# Altium PCB Driver4RackV3.9.PcbDoc
Units mm, origin at the board's own origin, x right, y up, seen from the top; angles counter-clockwise.
Board outline 134 x 129 mm, 2 copper layers (Top Layer, Bottom Layer); 115 components, 99 nets, 567 pads, 33 vias.
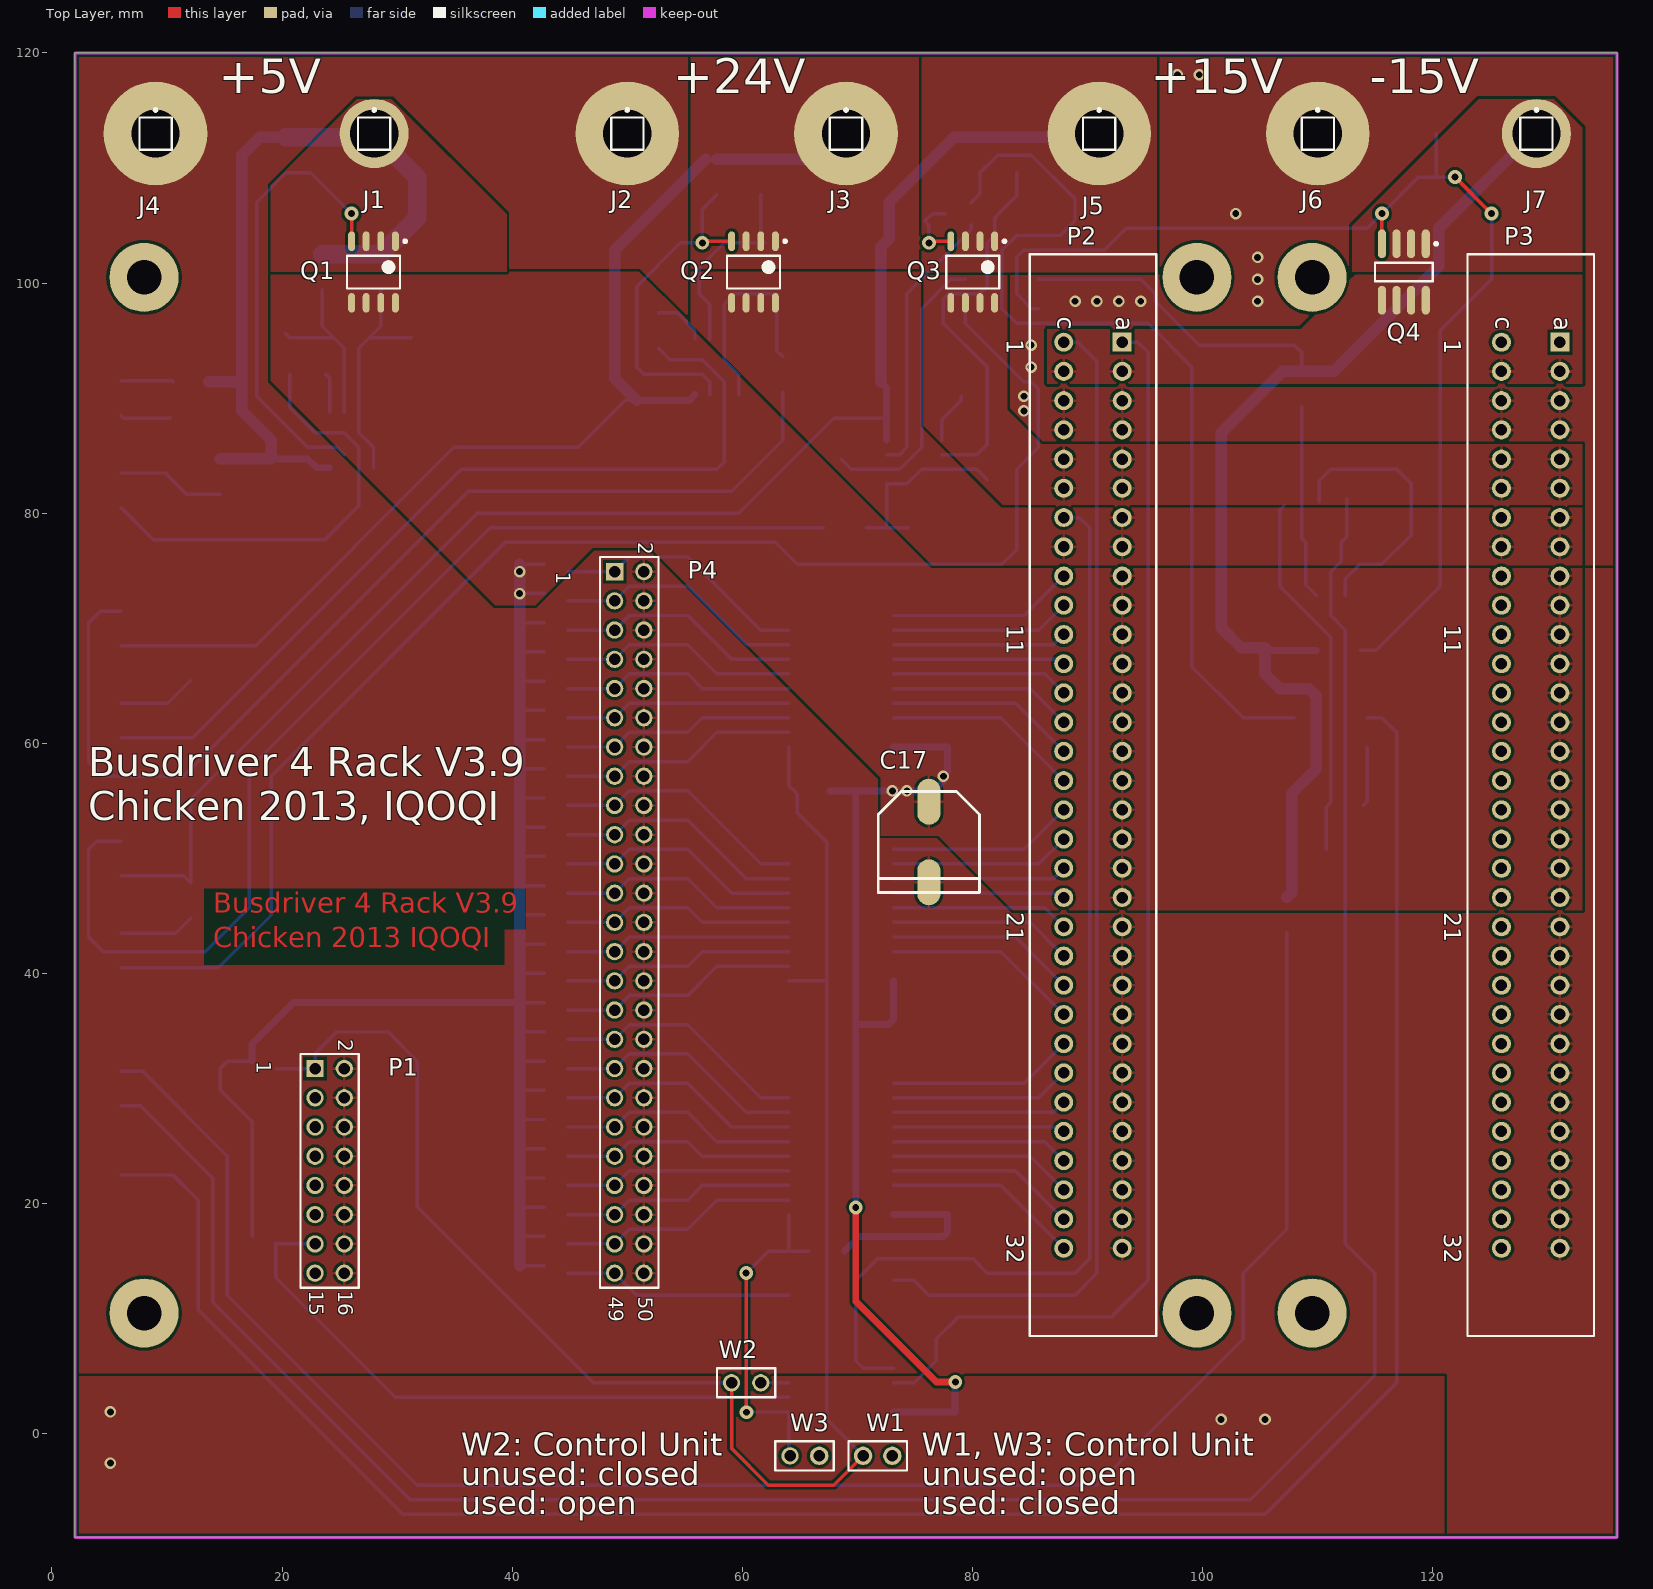
[diagram p0: Top Layer view]
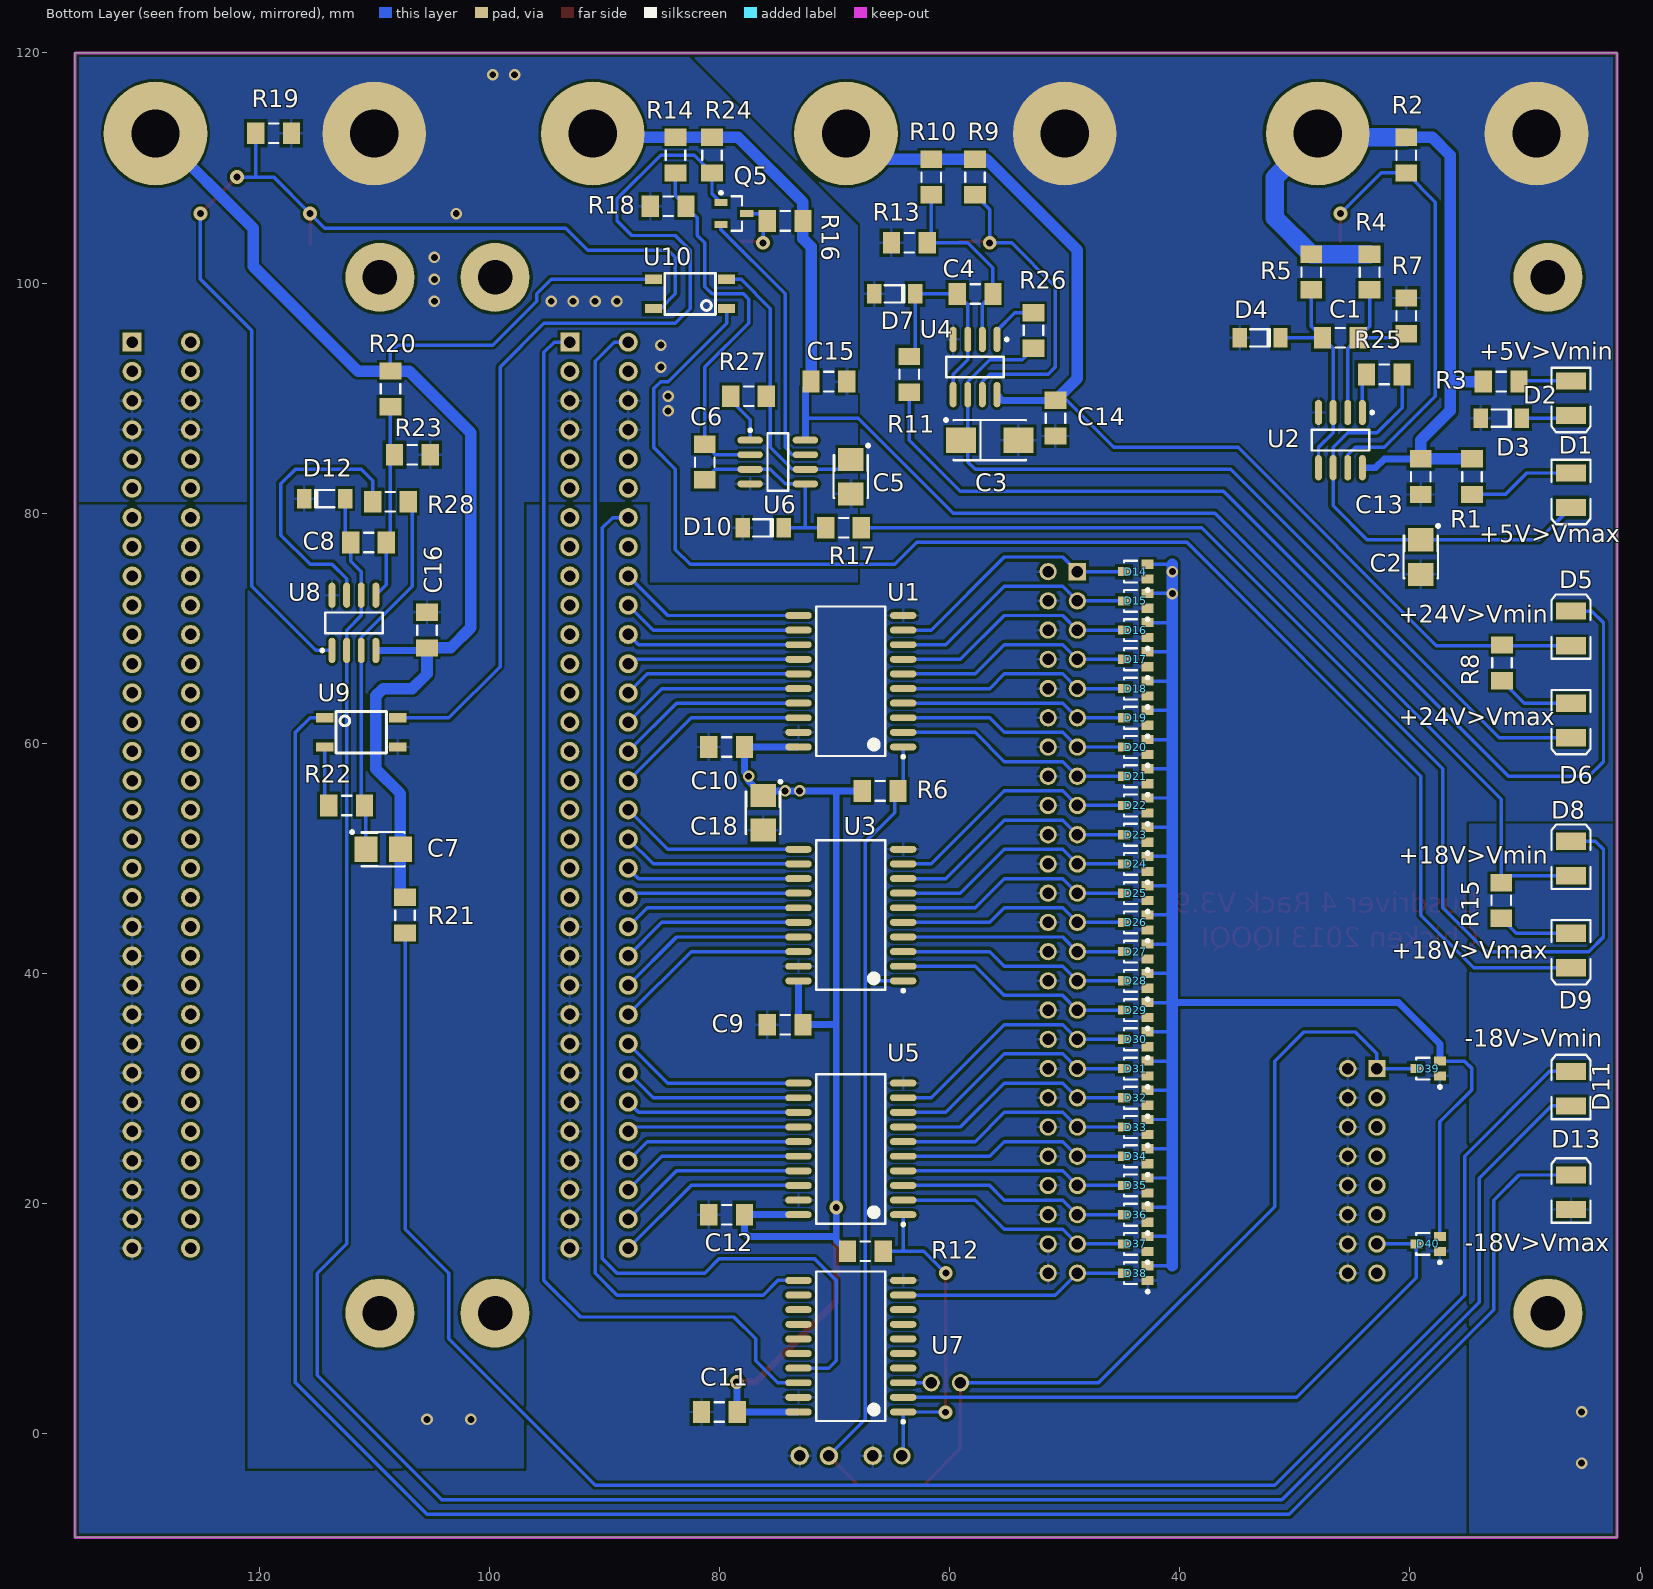
[diagram p1: Bottom Layer view, seen from below]

## Layer stack, top to bottom
Top Solder: solder mask 0.0102, Solder Resist, Dk 3.5
Top Layer: signal copper 0.0356
Dielectric1: dielectric 0.32, FR-4, Dk 4.8
Bottom Layer: signal copper 0.0356
Bottom Solder: solder mask 0.0102, Solder Resist, Dk 3.5

## Board outline
136,-9 2,-9 2,120 136,120

## Design rules (kind name [scope] priority, off if disabled: settings)
Clearance Clearance_2 [InNet('+5V','++5V','+24V','++24V','+18V','++18V','-18V','--18V','DGND','AGND') vs InNet('+5V','++5V','+24V','++24V','+18V','++18V','-18V','--18V','DGND','AGND')] p1 off: gap=0.5
Clearance [All] p2: gap=0.254
HoleSize [All] p1: absolutevalues=TRUE maxlimit=5 minlimit=0.025 maxpercent=80.000 minpercent=20.000
PolygonConnect PolygonConnect_1 [(ObjectKind = 'Via') And (ViaDiameter = AsMM(1)) And (HoleDiameter = AsMM(0.6))] p1: connectstyle=Direct reliefconductorwidth=0.254 reliefentries=4 polygonreliefangle="90 Angle" airgapwidth=0.254
PolygonConnect PolygonConnect_2 [InNet('+5V','++5V','+24V','++24V','+18V','++18V','-18V','--18V','DGND','AGND') vs ((ObjectKind = 'Pad') And (HoleDiameter = AsMM(4.2))) Or InComponent('Q1','Q2','Q3','Q4')] p2: connectstyle=Direct reliefconductorwidth=0.254 reliefentries=4 polygonreliefangle="90 Angle" airgapwidth=0.254
PolygonConnect [All] p3: connectstyle=Relief reliefconductorwidth=0.254 reliefentries=4 polygonreliefangle="90 Angle" airgapwidth=0.254
RoutingVias [All] p1: holewidth=0.6 width=1.2 viastyle="Through Hole" minholewidth=0.4 minwidth=1 maxholewidth=1 maxwidth=2
SilkToSolderMaskClearance SilkscreenOverComponentPads [IsPad] p1: minsilkscreentomaskgap=0.254 clearancetoexposedcopper=TRUE
SolderMaskExpansion [All] p1: expansion=0.102
Width [All] p1: maxlimit=5 minlimit=0.254 preferedwidth=0.254
27 further rules are at their usual default settings.

## Components (designator, comment, footprint, x,y, rotation, side; value= is the part's Value field where it differs from the comment)
C1 "Cap" CAPC3216M 26.035,95.25 r180 bottom
C2 "Cap Pol1" TC3528-1411 19.05,76.2 r270 bottom
C3 "Cap Pol1" TC6032-2412 56.515,86.36 r180 bottom
C4 "Cap" CAPC3216M 57.785,99.06 r180 bottom
C5 "Cap Pol1" TC3528-1411 68.58,83.185 r270 bottom
C6 "Cap" CAPC3216M 81.28,84.455 r90 bottom
C7 "Cap Pol1" TC3528-1411 109.22,50.8 r180 bottom
C8 "Cap" CAPC3216M 110.49,77.47 r180 bottom
C9 "Cap" CAPC3216M 74.295,35.56 r180 bottom
C10 "Cap" CAPC3216M 79.375,59.69 r180 bottom
C11 "Cap" CAPC3216M 80.01,1.905 r180 bottom
C12 "Cap" CAPC3216M 79.375,19.05 r180 bottom
C13 "Cap" CAPC3216M 19.05,83.185 r90 bottom
C14 "Cap" CAPC3216M 50.8,88.265 r90 bottom
C15 "Cap" CAPC3216M 70.485,91.44 r0 bottom
C16 "Cap" CAPC3216M 105.41,69.85 r90 bottom
C17 "Cap Pol1" ElkoSMD8 76.2,51.435 r180 top
C18 "Cap Pol1" TC3528-1411 76.2,53.975 r270 bottom
D1 "+5V>Vmax" 3.5X2.8X1.9 6,82 r270 bottom
D2 "+5V>Vmin" 3.5X2.8X1.9 6,90 r270 bottom
D3 "3V3" sod80c 12.065,88.265 r180 bottom
D4 "2V7" sod80c 33.02,95.25 r180 bottom
D5 "+24V>Vmin" 3.5X2.8X1.9 6,70 r90 bottom
D6 "+24V>Vmax" 3.5X2.8X1.9 6,62 r270 bottom
D7 "20V" sod80c 64.77,99.06 r180 bottom
D8 "+18V>Vmin" 3.5X2.8X1.9 6,50 r90 bottom
D9 "+18V>Vmax" 3.5X2.8X1.9 6,42 r270 bottom
D10 "12V" sod80c 76.2,78.74 r180 bottom
D11 "-18V>Vmin" 3.5X2.8X1.9 6,30 r90 bottom
D12 "12V" sod80c 114.3,81.28 r0 bottom
D13 "-18V>Vmax" 3.5X2.8X1.9 6,21 r90 bottom
D14 "1PS70SB14" SOT323 43.815,74.93 r90 bottom
D15 "1PS70SB14" SOT323 43.815,72.39 r90 bottom
D16 "1PS70SB14" SOT323 43.815,69.85 r90 bottom
D17 "1PS70SB14" SOT323 43.815,67.31 r90 bottom
D18 "1PS70SB14" SOT323 43.815,64.77 r90 bottom
D19 "1PS70SB14" SOT323 43.815,62.23 r90 bottom
D20 "1PS70SB14" SOT323 43.815,59.69 r90 bottom
D21 "1PS70SB14" SOT323 43.815,57.15 r90 bottom
D22 "1PS70SB14" SOT323 43.815,54.61 r90 bottom
D23 "1PS70SB14" SOT323 43.815,52.07 r90 bottom
D24 "1PS70SB14" SOT323 43.815,49.53 r90 bottom
D25 "1PS70SB14" SOT323 43.815,46.99 r90 bottom
D26 "1PS70SB14" SOT323 43.815,44.45 r90 bottom
D27 "1PS70SB14" SOT323 43.815,41.91 r90 bottom
D28 "1PS70SB14" SOT323 43.815,39.37 r90 bottom
D29 "1PS70SB14" SOT323 43.815,36.83 r90 bottom
D30 "1PS70SB14" SOT323 43.815,34.29 r90 bottom
D31 "1PS70SB14" SOT323 43.815,31.75 r90 bottom
D32 "1PS70SB14" SOT323 43.815,29.21 r90 bottom
D33 "1PS70SB14" SOT323 43.815,26.67 r90 bottom
D34 "1PS70SB14" SOT323 43.815,24.13 r90 bottom
D35 "1PS70SB14" SOT323 43.815,21.59 r90 bottom
D36 "1PS70SB14" SOT323 43.815,19.05 r90 bottom
D37 "1PS70SB14" SOT323 43.815,16.51 r90 bottom
D38 "1PS70SB14" SOT323 43.815,13.97 r90 bottom
D39 "1PS70SB14" SOT323 18.415,31.75 r90 bottom
D40 "1PS70SB14" SOT323 18.415,16.51 r90 bottom
J1 "+5V" PIN1#1 28,113 r0 top
J2 "DGND" PIN1#2 50,113 r0 top
J3 "+24V" PIN1#2 69,113 r0 top
J4 "DGND" PIN1#2 9,113 r0 top
J5 "+18V" PIN1#2 91,113 r0 top
J6 "AGND" PIN1#2 110,113 r0 top
J7 "-18V" PIN1#1 129,113 r0 top
P1 "Header 8X2" HDR2X8 22.86,31.75 r270 top
P2 "2x32 Pin" 0903164x922 90.46,55.5 r270 top
P3 "2x32 Pin" 0903164x922 128.5,55.5 r270 top
P4 "Header 25X2" HDR2X25 48.895,74.93 r270 top
Q1 "TPC8120" 2-6J1B 27.94,100.965 r270 top
Q2 "TPC8120" 2-6J1B 60.96,100.965 r270 top
Q3 "TPC8120" 2-6J1B 80.01,100.965 r270 top
Q4 "FDS6699S" SO-8_M 117.475,100.965 r270 top
Q5 "NPN" SOT-23B_N 78.74,106.045 r180 bottom
R1 "Res2" RESC3216M 14.605,83.185 r90 bottom
R2 "Res2" RESC3216M 20.32,111.125 r90 bottom
R3 "Res2" RESC3216M 12.065,91.44 r0 bottom
R4 "Res2" RESC3216M 23.495,100.965 r90 bottom
R5 "Res2" RESC3216M 28.575,100.965 r90 bottom
R6 "Res2" RESC3216M 66.04,55.88 r0 bottom
R7 "Res2" RESC3216M 20.32,97.155 r270 bottom
R8 "Res2" RESC3216M 12,67 r90 bottom
R9 "Res2" RESC3216M 57.785,109.22 r90 bottom
R10 "Res2" RESC3216M 61.595,109.22 r90 bottom
R11 "Res2" RESC3216M 63.5,92.075 r270 bottom
R12 "Res2" RESC3216M 67.31,15.875 r0 bottom
R13 "Res2" RESC3216M 63.5,103.505 r180 bottom
R14 "Res2" RESC3216M 83.82,111.125 r90 bottom
R15 "Res2" RESC3216M 12.065,46.355 r90 bottom
R16 "Res2" RESC3216M 74.295,105.41 r180 bottom
R17 "Res2" RESC3216M 69.215,78.74 r0 bottom
R18 "Res2" RESC3216M 84.455,106.68 r180 bottom
R19 "Res2" RESC3216M 118.745,113.03 r0 bottom
R20 "Res2" RESC3216M 108.585,90.805 r90 bottom
R21 "Res2" RESC3216M 107.315,45.085 r270 bottom
R22 "Res2" RESC3216M 112.395,54.61 r180 bottom
R23 "Res2" RESC3216M 106.68,85.09 r0 bottom
R24 "Res3216" RESC3216M 80.645,111.125 r270 bottom
R25 "3216" RESC3216M 22.225,92.075 r180 bottom
R26 "3216" RESC3216M 52.705,95.885 r270 bottom
R27 "3216" RESC3216M 77.47,90.17 r180 bottom
R28 "3216" RESC3216M 108.585,81 r180 bottom
U1 "74VHC245D" DW020_N 68.58,65.405 r0 bottom
U2 "LM2903D" 751-02_N 26.035,86.36 r270 bottom
U3 "74VHC245D" DW020_N 68.58,45.085 r0 bottom
U4 "LM2903D" 751-02_N 57.785,92.71 r270 bottom
U5 "74VHC245D" DW020_N 68.58,24.765 r0 bottom
U6 "LM2903D" 751-02_N 74.93,84.455 r180 bottom
U7 "74VHC245D" DW020_N 68.58,7.62 r0 bottom
U8 "LM2903D" 751-02_N 111.76,70.485 r90 bottom
U9 "PC357" PC357NJ 111.125,60.96 r180 bottom
U10 "PC357" PC357NJ 82.55,99.06 r0 bottom
W1 "Jumper" RAD-0.1#1 71.755,-1.905 r180 top
W2 "Jumper" RAD-0.1#2 60.325,4.445 r180 top
W3 "Jumper" RAD-0.1#3 65.405,-1.905 r180 top

## Footprints (in the part's own frame and the unit in brackets; to place one, negate y for a bottom-side part, rotate by r counter-clockwise, add the part's x,y. Pads: shape width x height; smd on the part's side, far side on the other; paste and mask are expansions set on the pad)
2-6J1B [mm] "Mosfet Toshiba TPC8120"
  oval 1.7x0.6 smd: 1(-2.675,1.905) 2(-2.675,0.635) 3(-2.675,-0.635) 4(-2.675,-1.905) 5(2.675,-1.905) 6(2.675,-0.635) 7(2.675,0.635) 8(2.675,1.905)
  silkscreen extent -2.8,-2.3 1.42,2.88, body extent -2.1,-2.3 2.1,2.3, height 1.7
3.5X2.8X1.9 [mm] "SM LED; 2 C-Bend Leads; Body 3.5 x 2.8 x 1.9 mm, inc leads (LxWxH typ)"
  rect 1.5x2.6 smd: 1(-1.5,0) 2(1.5,0)
  silkscreen extent -2.65,-1.7 2.95,1.7
751-02_N [mm] "SOIC, 8-Leads, Body 4.9x3.9mm, Pitch 1.27mm, IPC Medium Density"
  oval 2.2x0.6 smd: 1(-2.4,1.905) 2(-2.4,0.635) 3(-2.4,-0.635) 4(-2.4,-1.905) 5(2.4,-1.905) 6(2.4,-0.635) 7(2.4,0.635) 8(2.4,1.905)
  silkscreen extent -2.52,-2.5 0.9,2.88, body extent -1.95,-2.45 1.95,2.45, height 1.75
0903164x922 [mm] "Connector; DIN 41612, Type C, Thru-Hole; Rows a+c, 64 Position; Vertical; No Mounting Fixture"
  rect 1.65x1.65 hole 1: A1(-39.37,2.54)
  round 1.65 hole 1: A2(-36.83,2.54) A3(-34.29,2.54) A4(-31.75,2.54) A5(-29.21,2.54) A6(-26.67,2.54) A7(-24.13,2.54) A8(-21.59,2.54) A9(-19.05,2.54) A10(-16.51,2.54) A11(-13.97,2.54) A12(-11.43,2.54) A13(-8.89,2.54) A14(-6.35,2.54) A15(-3.81,2.54) A16(-1.27,2.54) A17(1.27,2.54) A18(3.81,2.54) A19(6.35,2.54) A20(8.89,2.54) A21(11.43,2.54) A22(13.97,2.54) A23(16.51,2.54) A24(19.05,2.54) A25(21.59,2.54) A26(24.13,2.54) A27(26.67,2.54) A28(29.21,2.54) A29(31.75,2.54) A30(34.29,2.54) A31(36.83,2.54) A32(39.37,2.54) C1(-39.37,-2.54) C2(-36.83,-2.54) C3(-34.29,-2.54) C4(-31.75,-2.54) C5(-29.21,-2.54) C6(-26.67,-2.54) C7(-24.13,-2.54) C8(-21.59,-2.54) C9(-19.05,-2.54) C10(-16.51,-2.54) C11(-13.97,-2.54) C12(-11.43,-2.54) C13(-8.89,-2.54) C14(-6.35,-2.54) C15(-3.81,-2.54) C16(-1.27,-2.54) C17(1.27,-2.54) C18(3.81,-2.54) C19(6.35,-2.54) C20(8.89,-2.54) C21(11.43,-2.54) C22(13.97,-2.54) C23(16.51,-2.54) C24(19.05,-2.54) C25(21.59,-2.54) C26(24.13,-2.54) C27(26.67,-2.54) C28(29.21,-2.54) C29(31.75,-2.54) C30(34.29,-2.54) C31(36.83,-2.54) C32(39.37,-2.54)
  silkscreen extent -47,-5.5 47,5.5
CAPC3216M [mm] "Chip Capacitor, Body 3.2x1.6mm, IPC Low Density"
  rect 1.5x1.9 smd: 1(-1.55,0) 2(1.55,0)
  silkscreen extent -0.4,-0.85 0.4,0.85, body extent -1.7,-0.9 1.7,0.9, height 1.35
DW020_N [mm] "SOIC, 20-Leads, Body 12.8x7.5mm, Pitch 1.27mm, IPC Medium Density"
  oval 2.3x0.6 smd: 1(-4.55,5.715) 2(-4.55,4.445) 3(-4.55,3.175) 4(-4.55,1.905) 5(-4.55,0.635) 6(-4.55,-0.635) 7(-4.55,-1.905) 8(-4.55,-3.175) 9(-4.55,-4.445) 10(-4.55,-5.715) 11(4.55,-5.715) 12(4.55,-4.445) 13(4.55,-3.175) 14(4.55,-1.905) 15(4.55,-0.635) 16(4.55,0.635) 17(4.55,1.905) 18(4.55,3.175) 19(4.55,4.445) 20(4.55,5.715)
  silkscreen extent -4.67,-6.5 3,6.69, body extent -3.75,-6.4 3.75,6.4, height 2.65
ElkoSMD8 [mm] "loe ESR Elko, D:8mm"
  oval 2x4 smd: 1(0,-3.5) 2(0,3.5)
  silkscreen extent -4.4,-4.4 4.4,4.4
HDR2X8 [mm] "Connector; Header; 8x2 Position"
  rect 1.5x1.5 hole 1: 1(0,0)
  round 1.5 hole 1: 2(0,2.54) 3(2.54,0) 4(2.54,2.54) 5(5.08,0) 6(5.08,2.54) 7(7.62,0) 8(7.62,2.54) 9(10.16,0) 10(10.16,2.54) 11(12.7,0) 12(12.7,2.54) 13(15.24,0) 14(15.24,2.54) 15(17.78,0) 16(17.78,2.54)
  silkscreen extent -1.27,-1.27 19.05,3.81
HDR2X25 [mm] "Connector; Header; 25x2 Position"
  rect 1.5x1.5 hole 1: 1(0,0)
  round 1.5 hole 1: 2(0,2.54) 3(2.54,0) 4(2.54,2.54) 5(5.08,0) 6(5.08,2.54) 7(7.62,0) 8(7.62,2.54) 9(10.16,0) 10(10.16,2.54) 11(12.7,0) 12(12.7,2.54) 13(15.24,0) 14(15.24,2.54) 15(17.78,0) 16(17.78,2.54) 17(20.32,0) 18(20.32,2.54) 19(22.86,0) 20(22.86,2.54) 21(25.4,0) 22(25.4,2.54) 23(27.94,0) 24(27.94,2.54) 25(30.48,0) 26(30.48,2.54) 27(33.02,0) 28(33.02,2.54) 29(35.56,0) 30(35.56,2.54) 31(38.1,0) 32(38.1,2.54) 33(40.64,0) 34(40.64,2.54) 35(43.18,0) 36(43.18,2.54) 37(45.72,0) 38(45.72,2.54) 39(48.26,0) 40(48.26,2.54) 41(50.8,0) 42(50.8,2.54) 43(53.34,0) 44(53.34,2.54) 45(55.88,0) 46(55.88,2.54) 47(58.42,0) 48(58.42,2.54) 49(60.96,0) 50(60.96,2.54)
  silkscreen extent -1.27,-1.27 62.23,3.81
PC357NJ [mm] "Optokoppler"
  rect 1.5x0.8 smd: 1(-3.175,1.27) 2(-3.175,-1.27) 3(3.175,-1.27) 4(3.175,1.27)
  silkscreen extent -2.2,-1.8 2.2,1.8
PIN1#1 [mm] "Connector; Plug"
  round 6 / inner round 9 / far side round 9 hole 4.2: 1(0,0)
  silkscreen extent -1.4,-1.4 1.4,2.17
PIN1#2 [mm] "Connector; Plug"
  round 9 hole 4.2: 1(0,0)
  silkscreen extent -1.4,-1.4 1.4,2.17
RAD-0.1#1 [mm] "Radial Cap, Thru-Hole; 2 Leads; 0.1 in Pin Spacing"
  round 1.6 hole 1: 1(-1.27,0) 2(1.27,0)
  silkscreen extent -2.54,-1.27 2.54,1.27
RAD-0.1#2 [mm] "Radial Cap, Thru-Hole; 2 Leads; 0.1 in Pin Spacing"
  round 1.5 hole 1: 1(-1.27,0) 2(1.27,0)
  silkscreen extent -2.54,-1.27 2.54,1.27
RAD-0.1#3 [mm] "Radial Cap, Thru-Hole; 2 Leads; 0.1 in Pin Spacing"
  round 1.6 hole 1: 1(-1.27,0)
  round 1.5 hole 1: 2(1.27,0)
  silkscreen extent -2.54,-1.27 2.54,1.27
RESC3216M [mm] "Chip Resistor, Body 3.2x1.6mm, IPC Low Density"
  rect 1.5x1.9 smd: 1(-1.55,0) 2(1.55,0)
  silkscreen extent -0.4,-0.85 0.4,0.85, body extent -1.68,-0.87 1.68,0.87, height 0.71
SO-8_M [mm] "SOIC, 8-Leads, Body 4.9x3.9mm, Pitch 1.27mm, IPC Low Density"
  oval 2.5x0.7 smd: 1(-2.45,1.905) 2(-2.45,0.635) 3(-2.45,-0.635) 4(-2.45,-1.905) 5(2.45,-1.905) 6(2.45,-0.635) 7(2.45,0.635) 8(2.45,1.905)
  silkscreen extent -2.57,-2.5 0.8,2.93, body extent -2,-2.5 2,2.5, height 1.75
sod80c [mm] "Metal Electrode Face (MELF) Diode; Body 3.5 x 1.6 mm (LxDia)"
  rect 1.25x1.7 smd: 1(-1.775,0) 2(1.775,0)
  silkscreen extent -0.85,-0.75 0.85,0.75
SOT323 [mm] "SOT-323/SC-70; 3 Leads; Body 2.2 x 2.2 mm, inc. leads (LxW max)"
  rect 0.8x1.05 smd: 1(-0.65,-1.025) 2(0.65,-1.025) 3(0,1.025)
  silkscreen extent -1.72,-1.15 0.95,1.03
SOT-23B_N [mm] "SOT23, 3-Leads, Body 2.9x1.3mm, Pitch 0.95mm, Lead Span 2.4mm, IPC Medium Density"
  rect 1.15x0.6 smd: 1(-1.125,0.95) 2(-1.125,-0.95) 3(1.125,0)
  silkscreen extent -1.25,-1.5 0.7,1.92, body extent -0.7,-1.5 0.7,1.5, height 1.14
TC3528-1411 [mm] "Capacitor, SM Tantalum; Body 3.5 x 2.8 mm (LxW typ)"
  rect 2x2.2 smd: 1(-1.5,0) 2(1.5,0)
  silkscreen extent -2.82,-1.5 1.85,1.62
TC6032-2412 [mm] "Capacitor, SM Tantalum; Body 6.0 x 3.2 mm (LxW typ)"
  rect 2.6x2.2 smd: 1(-2.5,0) 2(2.5,0)
  silkscreen extent -3.93,-1.75 3.15,1.87

## Part data
C1 C4 C6 C8 C9 C10 C11 C12 C13 C14 C15 C16: "Capacitor"
C2 C3 C5 C7 C17 C18: "Polarized Capacitor (Radial)"
D1 D5 D6 D8 D9 D11 D13: library part LED1, "Typical RED GaAs LED"
D2: library part LED3, "Typical BLUE SiC LED"
D3 D4 D7 D10 D12: library part "D Zener", "Zener Diode"
D14 D15 D16 D17 D18 D19 D20 D21 D22 D23 D24 D25 D26 D27 D28 D29 D30 D31 D32 D33 D34 D35 D36 D37 D38 D39 D40: "Schottky Barrier Double Diode"
J1 J2 J3 J4 J5 J6 J7: library part Socket, "Socket"
P1: "Header, 8-Pin, Dual row"
P2 P3: library part "64 Pin Header", "DIN 41612"
P4: "Header, 25-Pin, Dual row"
Q1 Q2 Q3: "Mosfet P"
Q4: library part MOSFET-N, "N-Channel MOSFET"
Q5: library part QNPN, "NPN Bipolar Transistor"
R1 R2 R3 R4 R5 R6 R7 R8 R9 R10 R11 R12 R13 R14 R15 R16 R17 R18 R19 R20 R21 R22 R23: "Resistor"
R24 R25 R26 R27 R28: library part Resistor3216, "Resistor"
U1 U3 U5 U7: library part SN74HC245DW, "Octal Bus Transceiver with 3-State Outputs"
U2 U4 U6 U8: "Dual Comparator"
U9 U10: library part Optoisolator1, "4-Pin Phototransistor Optocoupler"
W1 W2 W3: "Jumper Wire"

## Free pads (board coordinates)
  round 6 hole 3: 0(8,100.5) 0(109.5,100.5) 1(99.5,100.5) 2(99.5,10.5) 2(109.5,10.5) 3(8,10.5)

## Via types
v1: diameter 1, hole 0.6, Top Layer to Bottom Layer, 23 vias
v2: diameter 1.2, hole 0.6, Top Layer to Bottom Layer, 10 vias

## Nets (pads, with @x,y where several pads share a name; then routed paths per layer and width w, separated by ;. In a path a pad name is that pad's centre, name@x,y a point inside that pad or via, vN(x,y) a via of type N, cw(c..) or ccw(c..) an arc to the next point about the centre after c; other vN are vias at no path point)
1: D14.3 P4.1 U1.9 | length 22.3
  Bottom Layer w0.3: D14.3 P4.1 50.165,76.2 55.245,76.2 61.595,69.85 U1.9
2: D15.3 P4.3 U1.8 | length 21.8
  Bottom Layer w0.3: D15.3 P4.3 50.165,73.66 55.245,73.66 60.325,68.58 U1.8
3: D16.3 P4.5 U1.7 | length 21.3
  Bottom Layer w0.3: D16.3 P4.5 50.165,71.12 55.245,71.12 59.055,67.31 U1.7
4: D17.3 P4.7 U1.6 | length 20.8
  Bottom Layer w0.3: D17.3 P4.7 50.165,68.58 55.245,68.58 57.785,66.04 U1.6
5: D18.3 P4.9 U1.5 | length 20.2
  Bottom Layer w0.3: D18.3 P4.9 50.165,66.04 55.245,66.04 56.515,64.77 U1.5
6: D19.3 P4.11 U1.4 | length 19.7
  Bottom Layer w0.3: D19.3 P4.11 50.165,63.5 U1.4
7: D20.3 P4.13 U1.3 | length 20.2
  Bottom Layer w0.3: D20.3 P4.13 50.165,60.96 55.245,60.96 56.515,62.23 U1.3
8: D21.3 P4.15 U1.2 | length 20.8
  Bottom Layer w0.3: D21.3 P4.15 50.165,58.42 55.245,58.42 57.785,60.96 U1.2
9: D22.3 P4.17 U3.9 | length 22.3
  Bottom Layer w0.3: D22.3 P4.17 50.165,55.88 55.245,55.88 61.595,49.53 U3.9
10: D23.3 P4.19 U3.8 | length 21.8
  Bottom Layer w0.3: D23.3 P4.19 50.165,53.34 55.245,53.34 60.325,48.26 U3.8
11: D24.3 P4.21 U3.7 | length 21.3
  Bottom Layer w0.3: D24.3 P4.21 50.165,50.8 55.245,50.8 59.055,46.99 U3.7
12: D25.3 P4.23 U3.6 | length 20.8
  Bottom Layer w0.3: D25.3 P4.23 50.165,48.26 55.245,48.26 57.785,45.72 U3.6
13: D26.3 P4.25 U3.5 | length 20.2
  Bottom Layer w0.3: D26.3 P4.25 50.165,45.72 55.245,45.72 56.515,44.45 U3.5
14: D27.3 P4.27 U3.4 | length 19.7
  Bottom Layer w0.3: D27.3 P4.27 50.165,43.18 U3.4
15: D28.3 P4.29 U3.3 | length 20.2
  Bottom Layer w0.3: D28.3 P4.29 50.165,40.64 55.245,40.64 56.515,41.91 U3.3
16: D29.3 P4.31 U3.2 | length 20.8
  Bottom Layer w0.3: D29.3 P4.31 50.165,38.1 55.245,38.1 57.785,40.64 U3.2
17: D30.3 P4.33 U5.9 | length 22.3
  Bottom Layer w0.3: D30.3 P4.33 50.165,35.56 55.245,35.56 61.595,29.21 U5.9
18: D31.3 P4.35 U5.8 | length 21.8
  Bottom Layer w0.3: D31.3 P4.35 50.165,33.02 55.245,33.02 60.325,27.94 U5.8
19: D32.3 P4.37 U5.7 | length 21.3
  Bottom Layer w0.3: D32.3 P4.37 50.165,30.48 55.245,30.48 59.055,26.67 U5.7
20: D33.3 P4.39 U5.6 | length 20.8
  Bottom Layer w0.3: D33.3 P4.39 50.165,27.94 55.245,27.94 57.785,25.4 U5.6
21: D34.3 P4.41 U5.5 | length 20.2
  Bottom Layer w0.3: D34.3 P4.41 50.165,25.4 55.245,25.4 56.515,24.13 U5.5
22: D35.3 P4.43 U5.4 | length 19.7
  Bottom Layer w0.3: D35.3 P4.43 50.165,22.86 U5.4
23: D36.3 P4.45 U5.3 | length 20.2
  Bottom Layer w0.3: D36.3 P4.45 50.165,20.32 55.245,20.32 56.515,21.59 U5.3
24: D37.3 P4.47 U5.2 | length 20.8
  Bottom Layer w0.3: D37.3 P4.47 50.165,17.78 55.245,17.78 57.785,20.32 U5.2
25: D38.3 P4.49 U7.9 | length 20
  Bottom Layer w0.3: D38.3 P4.49 50.8,12.065 U7.9
+5V: C9.2 C10.2 C11.2 C12.2 C17.1 C18.1 D14.2 D15.2 D16.2 D17.2 D18.2 D19.2 D20.2 D21.2 D22.2 D23.2 D24.2 D25.2 D26.2 D27.2 D28.2 D29.2 D30.2 D31.2 D32.2 D33.2 D34.2 D35.2 D36.2 D37.2 D38.2 D39.2 D40.2 P2.A9 P2.A10 P2.A11 P2.A12 P2.A13 P2.A14 P2.A15 P2.A16 P2.A17 P2.A18 P2.A19 P2.A20 P3.A9 P3.A10 P3.A11 P3.A12 P3.A13 P3.A14 P3.A15 P3.A16 P3.A17 P3.A18 P3.A19 P3.A20 Q1.5 Q1.6 Q1.7 Q1.8 R6.2 R12.2 U1.20 U3.20 U5.20 U7.20 | length 266.9
  Top Layer w0.6: v2(69.85,19.685) 69.85,11.5 76.85,4.5 v2(78.5,4.5)
  Bottom Layer w0.3: D40.2 17.39,27.11 14.605,29.895 14.605,31.75 15.255,32.4 D39.2 ; 40.655,14.62 D38.2 ; 40.655,17.16 D37.2 ; 40.655,19.7 D36.2 ; 40.655,22.24 D35.2 ; 40.655,24.78 D34.2 ; 40.655,27.32 D33.2 ; 40.655,29.86 D32.2 ; 40.655,32.4 D31.2 ; 40.655,34.94 D30.2 ; 40.655,37.48 D29.2 ; 40.655,40.02 D28.2 ; 40.655,42.56 D27.2 ; 40.655,45.1 D26.2 ; 40.655,47.64 D25.2 ; 40.655,50.18 D24.2 ; 40.655,52.72 D23.2 ; 40.655,55.26 D22.2 ; 40.655,57.8 D21.2 ; 40.655,60.34 D20.2 ; 40.655,62.88 D19.2 ; 40.655,65.42 D18.2 ; 40.655,67.96 D17.2 ; 40.655,70.5 D16.2 ; v1@40.655,73.04 D15.2 ; 40.655,75.58 D14.2
  Bottom Layer w0.6: D39.2 17.39,33.9 20.97,37.48 40.655,37.48 ; R6.2 69.85,55.88 ; R12.2 69.85,16.865 69.85,17.145 ; C9.2 C9.2@72.67,35.56 ; U7.20 C11.2 78.46,4.46 v2(78.5,4.5) ; U5.20 C12.2 77.825,17.5 77.47,17.145 69.85,17.145 ; U3.20 73.13,36.02 C9.2@72.67,35.56 ; U1.20 C10.2 77.825,57.505 v1(77.47,57.15) 77.47,56.745 C18.1 ; C18.1@76.2,55.88 v1(74.295,55.88) v1(73.025,55.88) 69.85,55.88 ; 69.85,17.145 v2(69.85,19.685) 69.85,35.56 ; 69.85,35.56 C9.2@72.67,35.56 ; 69.85,35.56 69.85,55.88
  Bottom Layer w1: 40.64,14.605 40.655,14.62 40.655,17.16 40.655,19.7 40.655,22.24 40.655,24.78 40.655,27.32 40.655,29.86 40.655,32.4 40.655,34.94 40.655,37.48 40.655,40.02 40.655,42.56 40.655,45.1 40.655,47.64 40.655,50.18 40.655,52.72 40.655,55.26 40.655,57.8 40.655,60.34 40.655,62.88 40.655,65.42 40.655,67.96 40.655,70.5 40.655,73.04 40.655,75.58
  other v1: 40.64,73.025 40.64,74.93
+18V: P2.A5 P2.A6 P2.C5 P2.C6 P3.A5 P3.A6 P3.C5 P3.C6 Q3.5 Q3.6 Q3.7 Q3.8
+24V: P2.A7 P2.A8 P2.C8 P3.A7 P3.A8 P3.C8 Q2.5 Q2.6 Q2.7 Q2.8
++5V: C13.2 J1.1 Q1.1 Q1.2 Q1.3 R1.2 R2.2 R3.2 R4.2 R5.2 U2.8 | length 70.8
  Bottom Layer w0.6: C13.2 22.225,84.735 23,83.96 U2.8
  Bottom Layer w1: R3.2 16.51,91.44 ; R1.2 C13.2 19.05,86.36 16.51,88.9 16.51,91.44 ; R2.2 18.06,112.675 16.51,111.125 16.51,91.44
  Bottom Layer w1.6: R2.2 27.58,112.675 27.905,113 31.75,109.155 31.75,105.69 R5.2 R4.2
++18V: C15.2 D8.1 J5.1 Q3.1 Q3.2 Q3.3 R14.2 R15.2 R16.2 R24.1 U6.8 | length 129.6
  Bottom Layer w0.3: D8.1 11.47,48.5 R15.2 12.065,55.14 36.935,80.01 59.69,80.01 67.945,88.265 72.53,88.265
  Bottom Layer w0.6: C15.2 72.53,90.945 72.53,88.265 U6.8
  Bottom Layer w1: C15.2 72.035,103.15 72.745,103.86 R16.2 72.745,107.035 78.385,112.675 R24.1 R14.2 90.675,112.675 J5.1
++24V: C14.2 D5.1 J3.1 Q2.1 Q2.2 Q2.3 R8.2 R9.2 R10.2 U4.8 | length 94.5
  Bottom Layer w0.3: D5.1 17.7,68.5 34.925,85.725 45.72,85.725 49.81,89.815 C14.2 ; 56.795,110.77 R9.2
  Bottom Layer w0.6: C14.2 55.385,89.815 U4.8 ; J3.1@67.945,112.04 J3.1@68.905,113
  Bottom Layer w1: C14.2 48.895,91.72 48.895,102.87 56.795,110.77 ; R9.2 R10.2 J3.1@66.04,110.77
-18V: P2.A2 P2.C2 P3.A2 P3.C2 Q4.5 Q4.6 Q4.7 Q4.8
--18V: C7.2 C16.1 J7.1 Q4.1 Q4.2 Q4.3 R20.2 R21.1 U8.4 U10.3 | length 119.6
  Bottom Layer w0.3: U10.3 94.615,100.33 95.885,99.06 95.885,98.425 99.695,94.615 107.95,94.615 108.585,93.98 R20.2
  Bottom Layer w0.6: C16.1 105.625,68.085 U8.4
  Bottom Layer w1: R21.1 107.72,47.04 C7.2 107.72,55.65 109.855,57.785 109.855,64.135 109.22,64.77 106.68,64.77 105.41,66.04 C16.1 103.365,68.3 101.6,70.065 101.6,86.995 106.96,92.355 R20.2 111.405,92.355 120.52,101.47 120.52,104.775 128.745,113 J7.1
A0: P2.C25 U5.11 | length 16.2
  Bottom Layer w0.3: U5.11 84.49,30.48 P2.C25
A1: P2.C26 U5.12 | length 15.7
  Bottom Layer w0.3: U5.12 85.76,29.21 P2.C26
A2: P2.C27 U5.13 | length 15.2
  Bottom Layer w0.3: U5.13 87.03,27.94 P2.C27
A3: P2.C28 U5.14 | length 14.9
  Bottom Layer w0.3: U5.14 87.54,26.67 P2.C28
A4: P2.C29 U5.15 | length 15.5
  Bottom Layer w0.3: U5.15 86.27,25.4 P2.C29
A5: P2.C30 U5.16 | length 16
  Bottom Layer w0.3: U5.16 85,24.13 P2.C30
A6: P2.C31 U5.17 | length 16.5
  Bottom Layer w0.3: U5.17 83.73,22.86 P2.C31
A7: P2.C32 U5.18 | length 17.1
  Bottom Layer w0.3: U5.18 82.46,21.59 P2.C32
AGND: C5.2 C15.1 C16.2 D10.1 D12.2 D13.1 J6.1 P2.A3 P2.A4 P2.C3 P2.C4 P3.A3 P3.A4 P3.C3 P3.C4 R18.1 R19.1 R23.1 U6.4 U8.8 U9.3
  other v1: 5.08,-2.54 101.6,1.27 105.41,1.27 5.08,1.905 84.455,88.9 84.455,90.17 85.09,92.71 85.09,94.615 88.9,98.425 90.805,98.425 92.71,98.425 94.615,98.425 104.775,98.425 104.775,100.33 104.775,102.235 102.87,106.045 97.79,118.11 99.695,118.11
D00: P2.C9 U1.11 | length 16.2
  Bottom Layer w0.3: U1.11 84.49,71.12 P2.C9
D01: P2.C10 U1.12 | length 15.7
  Bottom Layer w0.3: U1.12 85.76,69.85 P2.C10
D02: P2.C11 U1.13 | length 15.2
  Bottom Layer w0.3: U1.13 87.03,68.58 P2.C11
D03: P2.C12 U1.14 | length 14.9
  Bottom Layer w0.3: U1.14 87.54,67.31 P2.C12
D04: P2.C13 U1.15 | length 15.5
  Bottom Layer w0.3: U1.15 86.27,66.04 P2.C13
D05: P2.C14 U1.16 | length 16
  Bottom Layer w0.3: U1.16 85,64.77 P2.C14
D06: P2.C15 U1.17 | length 16.5
  Bottom Layer w0.3: U1.17 83.73,63.5 P2.C15
D07: P2.C16 U1.18 | length 17.1
  Bottom Layer w0.3: U1.18 82.46,62.23 P2.C16
D08: P2.C17 U3.11 | length 16.2
  Bottom Layer w0.3: U3.11 84.49,50.8 P2.C17
D09: P2.C18 U3.12 | length 15.7
  Bottom Layer w0.3: U3.12 85.76,49.53 P2.C18
D10: P2.C19 U3.13 | length 15.2
  Bottom Layer w0.3: U3.13 87.03,48.26 P2.C19
D11: P2.C20 U3.14 | length 14.9
  Bottom Layer w0.3: U3.14 87.54,46.99 P2.C20
D12: P2.C21 U3.15 | length 15.5
  Bottom Layer w0.3: U3.15 86.27,45.72 P2.C21
D13: P2.C22 U3.16 | length 16
  Bottom Layer w0.3: U3.16 85,44.45 P2.C22
D14: P2.C23 U3.17 | length 16.5
  Bottom Layer w0.3: U3.17 83.73,43.18 P2.C23
D15: P2.C24 U3.18 | length 17.1
  Bottom Layer w0.3: U3.18 82.46,41.91 P2.C24
DGND: C2.2 C3.2 C9.1 C10.1 C11.1 C12.1 C13.1 C14.1 C17.2 C18.2 D3.1 D4.1 D7.1 D14.1 D15.1 D16.1 D17.1 D18.1 D19.1 D20.1 D21.1 D22.1 D23.1 D24.1 D25.1 D26.1 D27.1 D28.1 D29.1 D30.1 D31.1 D32.1 D33.1 D34.1 D35.1 D36.1 D37.1 D38.1 D39.1 D40.1 J2.1 J4.1 P1.2 P1.4 P1.6 P1.8 P1.10 P1.12 P1.14 P1.16 P2.A21 P2.A22 P2.A23 P2.A24 P2.A25 P2.A26 P2.A27 P2.A28 P2.A29 P2.A30 P2.A31 P2.A32 P3.A21 P3.A22 P3.A23 P3.A24 P3.A25 P3.A26 P3.A27 P3.A28 P3.A29 P3.A30 P3.A31 P3.A32 P4.2 P4.4 P4.6 P4.8 P4.10 P4.12 P4.14 P4.16 P4.18 P4.20 P4.22 P4.24 P4.26 P4.28 P4.30 P4.32 P4.34 P4.36 P4.38 P4.40 P4.42 P4.44 P4.46 P4.48 P4.50 R7.1 R13.1 U1.10 U1.19 U2.4 U3.10 U3.19 U4.4 U5.10 U5.19 U7.10 U7.19 W1.1 W3.1
DIRECT: P2.C7 U7.17 | length 98.8
  Bottom Layer w0.3: U7.17 70.485,5.715 69.85,6.35 69.85,13.335 71.755,15.24 80.01,15.24 81.28,13.97 88.9,13.97 90.17,15.24 90.17,78.74 89.28,79.63 P2.C7
DIRECTIN: D39.3 P1.1 R6.1 U1.1 U3.1 W1.2 W2.2 | length 148.8
  Top Layer w0.3: W2.2 59.055,-1.27 62.23,-4.445 67.945,-4.445 W1.2
  Bottom Layer w0.3: D39.3 P1.1 22.86,33.02 24.765,34.925 29.21,34.925 31.75,32.385 31.75,19.75 47.055,4.445 W2.2 ; U3.1 67.31,39.37 ; U1.1 64.03,56.34 R6.1 64.77,55.6 64.77,53.975 67.31,51.435 67.31,39.37 ; W1.2 67.31,1.27 67.31,39.37
NetC1_1: C1.1 D4.2 R5.1 U2.3 U2.5 | length 20.4
  Bottom Layer w0.3: U2.5 27.94,85.725 26.67,86.995 U2.3 26.67,94.335 C1.1 ; R5.1 28.575,96.24 C1.1 ; D4.2 C1.1
NetC1_2: C1.2 R4.1 R7.2 U2.2 | length 15.8
  Bottom Layer w0.3: R7.2 20.675,95.25 C1.2 ; R4.1 23.495,96.24 C1.2 ; U2.2 25.4,94.335 C1.2
NetC2_1: C2.1 D1.2 R25.2 U2.6 | length 38.5
  Bottom Layer w0.3: D1.2 8.8,77.7 C2.1 23.725,77.7 26.67,80.645 U2.6 26.67,85.725 25.4,86.995 22.86,86.995 20.675,89.18 R25.2
NetC3_1: C3.1 D6.2 R26.2 U4.6 | length 76.2
  Bottom Layer w0.3: D6.2 12.24,60.5 35.56,83.82 57.785,83.82 58.42,84.455 U4.6 58.42,91.44 56.515,93.345 53.695,93.345 R26.2
NetC4_1: C4.1 D7.2 R11.1 U4.3 U4.5 | length 19
  Bottom Layer w0.3: U4.5 59.69,92.075 58.42,93.345 U4.3 58.42,98.145 C4.1 D7.2 62.995,94.13 R11.1
NetC4_2: C4.2 R10.1 R13.2 U4.2 | length 17.5
  Bottom Layer w0.3: U4.2 57.15,98.145 C4.2 56.235,101.32 58.42,103.505 R13.2 61.595,103.86 R10.1
NetC6_1: C6.1 D10.2 R17.2 U6.3 U6.5 | length 17.1
  Bottom Layer w0.3: R17.2 72.53,78.74 ; D10.2 72.53,78.74 ; C6.1 80.365,83.82 U6.3 75.565,83.82 74.295,82.55 U6.5 72.53,78.74
NetC6_2: C6.2 R14.1 R18.2 U6.2 | length 33.7
  Bottom Layer w0.3: U6.2 80.365,85.09 C6.2 81.28,92.71 77.46,96.53 77.46,98.615 77.905,99.06 80.645,99.06 81.28,99.695 81.28,103.505 81.915,104.14 81.915,105.69 R18.2 83.82,107.595 R14.1
NetC7_1: C7.1 R22.2 R28.2 U8.3 | length 32
  Bottom Layer w0.3: R28.2@107.035,80.645 106.68,80.29 106.68,73.66 111.125,69.215 U8.3 111.125,54.89 R22.2 110.72,54.485 C7.1
NetC8_1: C8.1 D11.1 D12.1 U8.2 U8.6 | length 212.3
  Bottom Layer w0.3: D11.1 7.695,28.5 13.97,22.225 13.97,11.43 31.115,-5.715 104.14,-5.715 114.935,5.08 114.935,13.97 112.395,16.51 112.395,69.85 111.125,71.12 U8.6 111.125,74.93 112.04,75.845 C8.1 112.525,77.955 D12.1
NetC8_2: C8.2 R20.1 R23.2 U8.5 | length 16.9
  Bottom Layer w0.3: R20.1 108.585,77.825 C8.2 108.94,73.8 U8.5
NetD1_1: D1.1 R1.1 | length 9.4
  Bottom Layer w0.3: D1.1 9.845,83.5 11.71,81.635 R1.1
NetD2_1: D2.1 R3.1 | length 4.5
  Bottom Layer w0.3: D2.1 10.455,91.5 R3.1
NetD2_2: D2.2 D3.2 | length 4.4
  Bottom Layer w0.3: D2.2 6.235,88.265 D3.2
NetD5_2: D5.2 R11.2 | length 92.4
  Bottom Layer w0.3: D5.2 4.19,71.5 3.175,70.485 3.175,58.42 4.445,57.15 11.43,57.15 36.195,81.915 59.055,81.915 63.5,86.36 R11.2
NetD6_1: D6.1 R8.1 | length 6.8
  Bottom Layer w0.3: D6.1 10.05,63.5 R8.1
NetD8_2: D8.2 R17.1 | length 97.4
  Bottom Layer w0.3: D8.2 3.875,51.5 3.175,50.8 3.175,43.18 4.445,41.91 13.335,41.91 17.145,45.72 17.145,57.785 38.1,78.74 R17.1@67.03,78.74
NetD9_1: D9.1 R15.1 | length 6.6
  Bottom Layer w0.3: D9.1 10.76,43.5 R15.1
NetD11_2: D11.2 R21.2 | length 161.6
  Bottom Layer w0.3: D11.2 7.87,31.5 15.24,24.13 15.24,12.065 31.75,-4.445 90.805,-4.445 103.505,8.255 103.505,13.97 107.315,17.78 R21.2
NetQ1_4: Q1.4 R2.1 U2.7 | length 39.8
  Top Layer w0.3: Q1.4 v2(26.035,106.045)
  Bottom Layer w0.3: 25.4,85.09 24.765,85.725 22.225,85.725 17.78,90.17 17.78,107.035 R2.1 22.505,109.575 v2(26.035,106.045)
NetQ2_4: Q2.4 R9.1 U4.7 | length 29.6
  Top Layer w0.3: v2(56.515,103.505) 56.65,103.64 Q2.4
  Bottom Layer w0.3: U4.7 57.15,91.44 56.515,92.075 51.435,92.075 50.8,92.71 50.8,99.695 54.61,103.505 v2(56.515,103.505) 56.515,106.4 R9.1
NetQ3_4: Q3.4 Q5.3 R16.1 | length 6
  Top Layer w0.3: v2(76.2,103.505) 76.335,103.64 Q3.4
  Bottom Layer w0.3: v2(76.2,103.505) 76.2,105.055 R16.1 76.48,106.045 Q5.3
NetQ4_4: Q4.4 R19.2 U8.1 U10.4 | length 101
  Top Layer w0.3: Q4.4 v2(115.57,106.045) ; v2(121.92,109.22) v2(125.095,106.045)
  Bottom Layer w0.3: U10.4 85.09,97.79 83.82,99.06 83.82,102.235 84.455,102.87 91.44,102.87 93.345,104.775 114.3,104.775 v2(115.57,106.045) 118.745,109.22 v2(121.92,109.22) ; U8.1 115.075,68.085 120.65,73.66 120.65,95.885 125.095,100.33 v2(125.095,106.045) ; 120.295,109.258 R19.2
NetQ5_1: Q5.1 R24.2 U9.4 | length 83.1
  Bottom Layer w0.3: Q5.1 80.645,107.775 R24.2 82.195,111.125 85.09,111.125 88.9,107.315 88.9,105.41 87.63,104.14 83.82,104.14 82.55,102.87 82.55,97.79 83.82,96.52 95.25,96.52 99.06,92.71 99.06,66.675 103.505,62.23 U9.4
NetQ5_2: Q5.2 U6.7 | length 23.7
  Bottom Layer w0.3: U6.7 73.66,85.09 74.295,85.725 74.295,99.06 79.865,104.63 Q5.2
NetR12_1: R12.1 U5.1 U7.1 W3.2 | length 29
  Top Layer w0.3: v2(60.325,13.97) 60.325,1.905 v2(60.351,1.879)
  Bottom Layer w0.3: v2(60.325,13.97) 62.23,15.875 64.03,15.875 ; v2(60.351,1.879) 60.377,1.905 U7.1 64.03,-1.8 W3.2 ; U5.1 64.03,15.875 ; R12.1 64.03,15.875
NetR25_1: R25.1 U2.1 | length 3.5
  Bottom Layer w0.3: R25.1 24.13,91.72 U2.1
NetR26_1: R26.1 U4.1 | length 4.6
  Bottom Layer w0.3: R26.1 54.33,97.435 55.88,95.885 U4.1
NetR27_1: R27.1 U6.1 | length 4.5
  Bottom Layer w0.3: U6.1 77.33,88.125 79.02,89.815 R27.1
NetR28_1: R28.1 U8.7 | length 23.9
  Bottom Layer w0.3: R28.1 110.135,82.83 111.125,83.82 116.84,83.82 118.11,82.55 118.11,78.105 115.57,75.565 113.665,75.565 112.395,74.295 U8.7
NetU7_3: U7.3 W2.1 | length 2.4
  Bottom Layer w0.3: W2.1 U7.3
STROBE: P2.C1 U7.11 | length 101.8
  Bottom Layer w0.3: U7.11 74.93,13.335 76.2,12.065 88.9,12.065 90.805,13.97 90.805,93.195 89.13,94.87 P2.C1
SYNC: P2.A1 U7.18 | length 110.2
  Bottom Layer w0.3: U7.18 74.93,4.445 76.835,6.35 76.835,8.255 78.74,10.16 92.075,10.16 95.25,13.335 95.25,93.98 94.36,94.87 P2.A1
SYNCIN: D40.3 P1.13 U7.2 | length 55.2
  Bottom Layer w0.3: P1.13 D40.3 19.44,13.58 29.845,3.175 U7.2
X+18V: D9.2 U10.1 | length 126.3
  Bottom Layer w0.3: D9.2 14.465,40.5 19.05,45.085 19.05,57.15 39.37,77.47 62.865,77.47 64.77,75.565 82.55,75.565 83.82,76.835 83.82,83.82 85.725,85.725 85.725,90.805 85.09,91.44 84.455,91.44 79.375,96.52 U10.1
X-18V: D13.2 U9.1 | length 192.9
  Bottom Layer w0.3: D13.2 10.52,22.5 12.7,20.32 12.7,10.795 30.48,-6.985 105.41,-6.985 116.84,4.445 116.84,60.96 115.57,62.23 U9.1
Y+18V: C5.1 R27.2 U6.6 U10.2 | length 25.1
  Bottom Layer w0.3: C5.1 69.445,83.82 U6.6 73.66,83.82 75.565,85.725 75.565,97.79 78.105,100.33 U10.2
Y-18V: R22.1 U9.2 | length 5.2
  Bottom Layer w0.3: R22.1 114.3,54.965 U9.2
pads on no net: P1.3 P1.5 P1.7 P1.9 P1.11 P1.15 P3.A1 P3.C1 P3.C7 P3.C9 P3.C10 P3.C11 P3.C12 P3.C13 P3.C14 P3.C15 P3.C16 P3.C17 P3.C18 P3.C19 P3.C20 P3.C21 P3.C22 P3.C23 P3.C24 P3.C25 P3.C26 P3.C27 P3.C28 P3.C29 P3.C30 P3.C31 P3.C32 U7.4 U7.5 U7.6 U7.7 U7.8 U7.12 U7.13 U7.14 U7.15 U7.16

## Polygon pours and split planes (outlines as drawn)
++18V on Top Layer "BottomLayer-No Net" (solid, pour order 22): 75.565,120.015 75.565,100.965 96,100.965 96,120.015
AGND on Top Layer "BottomLayer-No Net" (solid, pour order 27): 136,120 136,75.5 82.5,75.5 82.5,120
-18V on Top Layer "BottomLayer-No Net" (solid, pour order 21): 113.5,101 133,101 133,91.259 86.5,91.259 86.5,96 108.5,96
+18V on Top Layer "BottomLayer-No Net" (solid, pour order 24): 75.5,101 75.5,87.5 82.5,80.5 84.5,80.5 132.9,80.5 133,80.4 133,86 86,86 83,89 83,97 83,101
++24V on Top Layer "BottomLayer-No Net" (solid, pour order 23): 55.5,101 55.5,120 75.5,120 75.5,101
AGND on Top Layer "BottomLayer-No Net" (solid, pour order 26): 2,-9 121,-9 121,5 2,5
++5V on Top Layer "BottomLayer-No Net" (solid, pour order 18): 28,116 26.5,116 19,108.5 19,107 19,101 39.5,101 39.5,106 29.5,116 27.5,116
DGND on Top Layer "BottomLayer-No Net" (solid, pour order 28): 2,-9 136,-9 136,120 2,120
+24V on Top Layer "BottomLayer-No Net" (solid, pour order 17): 75.5,101 55.5,101 55.5,96.5 76.5,75.5 89,75.5 133,75.5 133,80.5 82.5,80.5 75.5,87.5 75.5,89 75.5,101
--18V on Top Layer "BottomLayer-No Net" (solid, pour order 16): 124,116 130.5,116 133,113.5 133,101 113,101 113,105
+5V on Top Layer "BottomLayer-No Net" (solid, pour order 19): 19,101 51,101 76.5,75.5 133,75.5 133,45.5 83.5,45.5 77,52 72,52 72,57 52,77 47,77 42,72 38.5,72 19,91.5
DGND on Bottom Layer "BottomLayer-No Net" (solid, pour order 31): 2,-9 2,120 136,120 136,-9
AGND on Bottom Layer "BottomLayer-No Net" (solid, pour order 29): 2,-9 2,53 14.828,53 14.828,-9
AGND on Bottom Layer "BottomLayer-No Net" (solid, pour order 30): 136,120 136,81 121,81 121,-3 97,-3 97,81 86,81 86,74 68,74 68,105 83,120

## Keep-outs
Keep-Out Layer:
  the board outline again, w0.254

## Other copper
Top Layer:
  text "Busdriver 4 Rack V3.9" at 14,44.665 h3
  text "Chicken 2013 IQOQI" at 14,41.665 h3

## Silkscreen, mask and mechanical layers (free items; w line width, h text height)
Top Overlay:
  text "+5V" at 14.5,116.5 h3
  text "+24V" at 54,116.5 h3
  text "+15V" at 95.5,116.5 h3
  text "-15V" at 114.5,116.5 h3
  text "Busdriver 4 Rack V3.9" at 3.175,57.15 h2.5
  text "Chicken 2013, IQOQI" at 3.175,53.34 h2.5
  text "W2: Control Unit" at 35.56,-1.905 h2
  text "W1, W3: Control Unit" at 75.565,-1.905 h2
  text "unused: closed" at 35.56,-4.445 h2
  text "unused: open" at 75.565,-4.445 h2
  text "used: open" at 35.56,-6.985 h2
  text "used: closed" at 75.565,-6.985 h2
Mechanical 1:
  lines w0.254: 2,-15.254 2,-14.746 ; 3.524,-15.508 2,-15 ; 3.524,-14.492 2,-15 ; 63.261,-15 2,-15 ; 74.739,-15 136,-15 ; 134.476,-15.508 136,-15 ; 134.476,-14.492 136,-15 ; 136,-15.254 136,-14.746 ; 142.492,-7.476 143,-9 ; 142.492,118.476 143,120 ; 142.746,-9 143.254,-9 ; 142.746,120 143.254,120 ; 143,49.761 143,-9 ; 143,61.239 143,120 ; 143.508,-7.476 143,-9 ; 143.508,118.476 143,120
  text "129 (mm)" at 143.914,50.015 h1.52 r90
  text "134 (mm)" at 63.515,-15.914 h1.52

## Text inside footprints (layer, text, board x,y; h text height)
P1: Top Overlay "2" at 24.892,34.29 h1.27 r270; Top Overlay "1" at 17.78,32.385 h1.27 r270; Top Overlay "15" at 22.352,12.446 h1.27 r270; Top Overlay "16" at 24.892,12.446 h1.27 r270
P2: Top Overlay "1" at 82.96,95.12 h1.5 r270; Top Overlay "a" at 92.5,97.08 h1.5 r270; Top Overlay "c" at 87.42,97.08 h1.5 r270; Top Overlay "32" at 82.96,17.38 h1.5 r270; Top Overlay "11" at 82.96,70.32 h1.5 r270; Top Overlay "21" at 82.96,45.32 h1.5 r270
P3: Top Overlay "1" at 121,95.12 h1.5 r270; Top Overlay "a" at 130.54,97.08 h1.5 r270; Top Overlay "c" at 125.46,97.08 h1.5 r270; Top Overlay "32" at 121,17.38 h1.5 r270; Top Overlay "11" at 121,70.32 h1.5 r270; Top Overlay "21" at 121,45.32 h1.5 r270
P4: Top Overlay "2" at 50.927,77.47 h1.27 r270; Top Overlay "1" at 43.815,74.93 h1.27 r270; Top Overlay "49" at 48.387,11.938 h1.27 r270; Top Overlay "50" at 50.927,11.938 h1.27 r270